# Altium PCB PCB1.PcbDoc
Units mm, origin at the board's own origin, x right, y up, seen from the top; angles counter-clockwise.
Board outline 31 x 60 mm, 2 copper layers (Top Layer, Bottom Layer); 43 components, 34 nets, 207 pads, 489 vias.
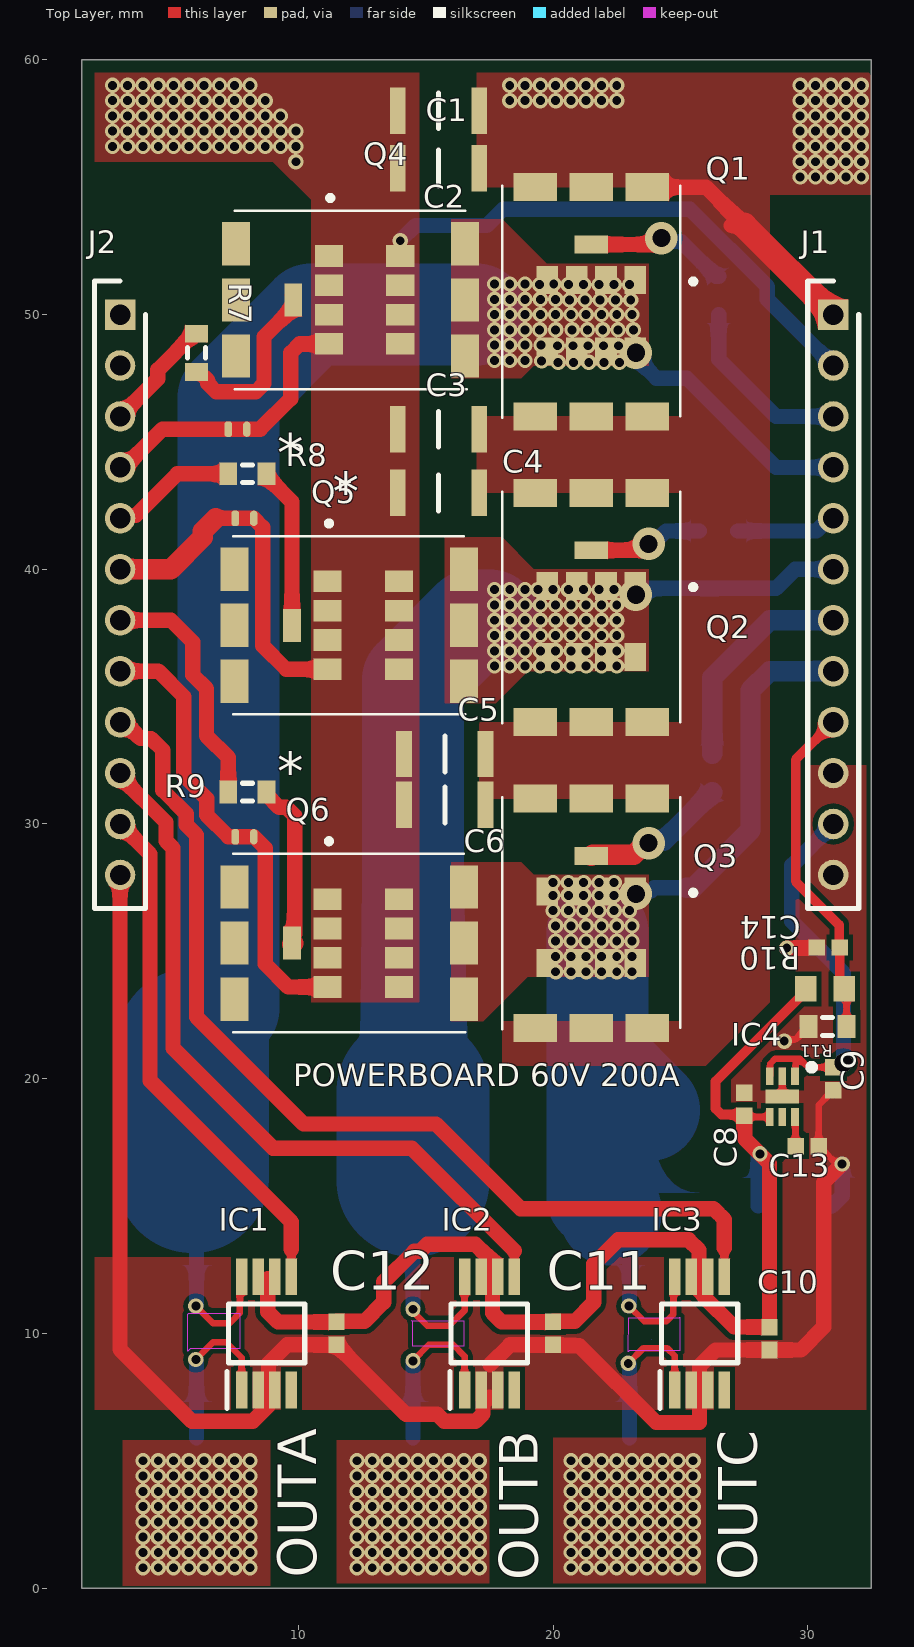
[diagram p0: Top Layer view]
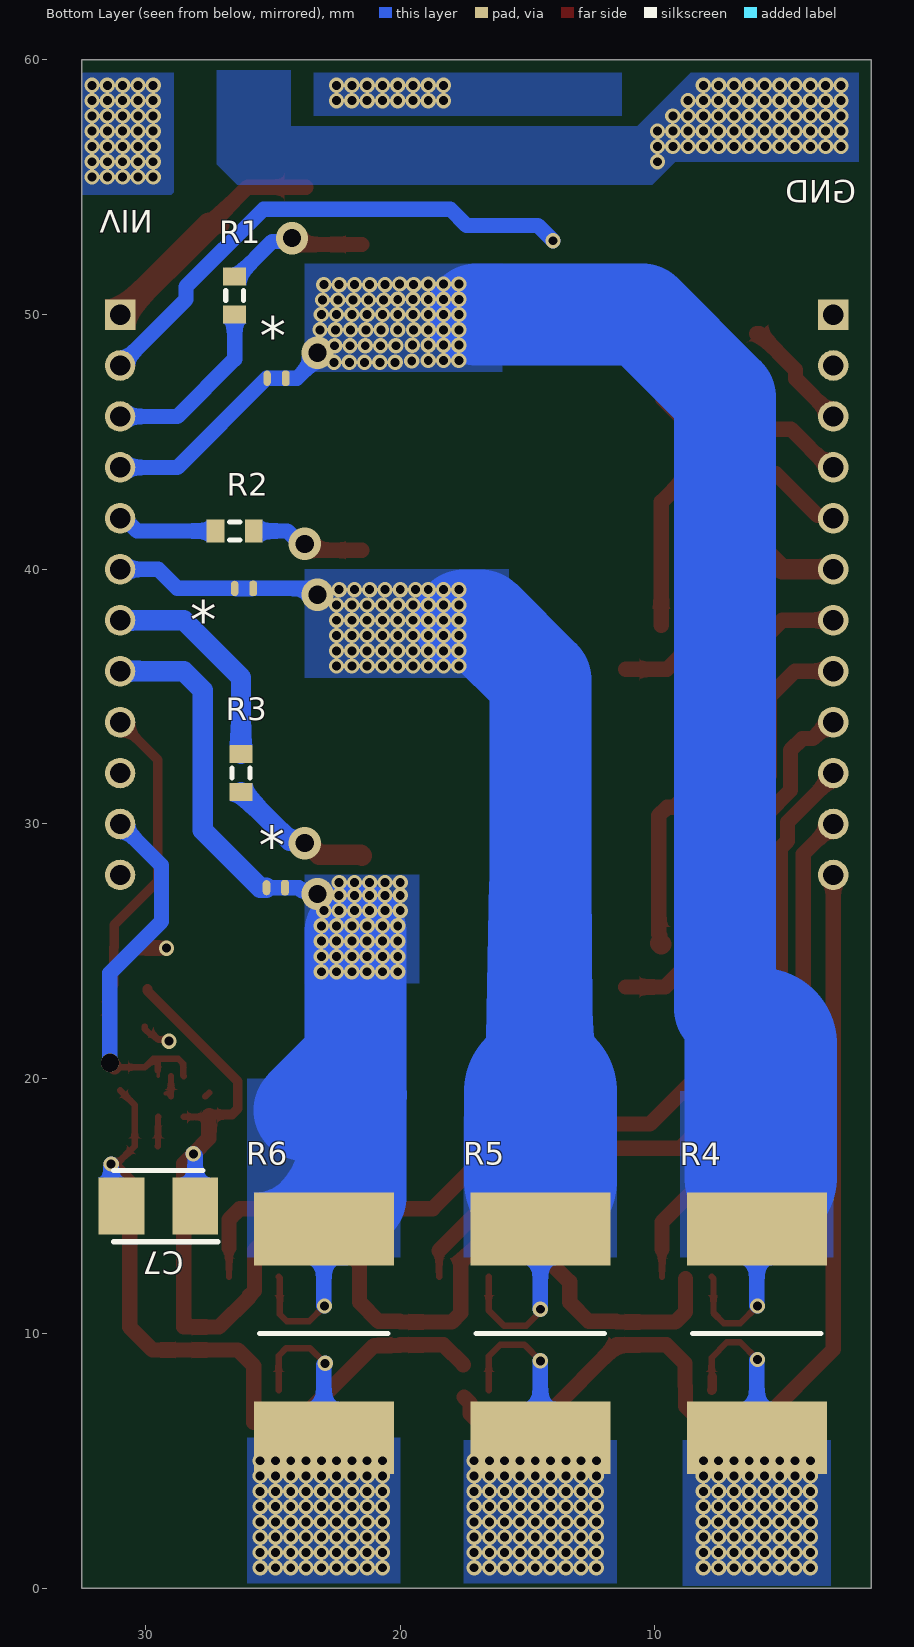
[diagram p1: Bottom Layer view, seen from below]
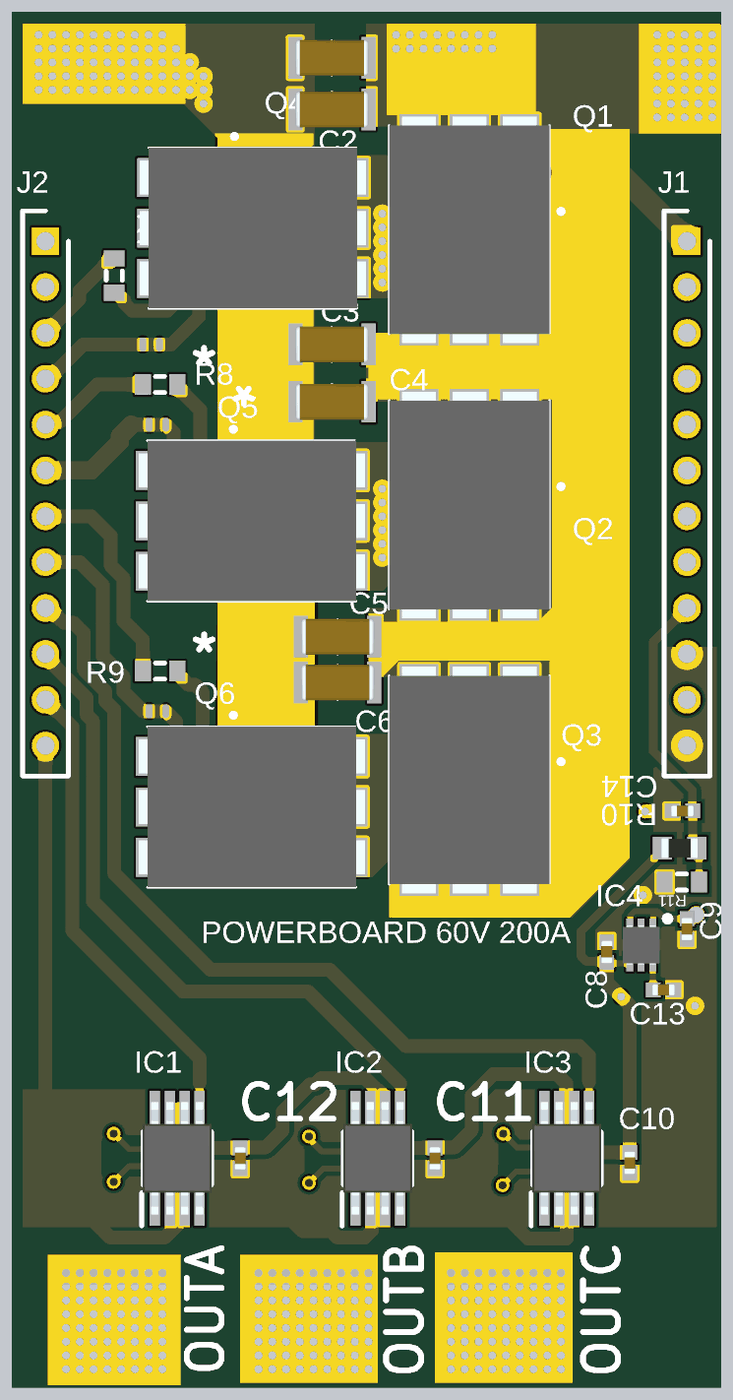
[diagram p2: 3D render of the assembled board from above, using the file's embedded part models]

## Layer stack, top to bottom
Top Solder: solder mask 0.0102, Solder Resist, Dk 3.5
Top Layer: signal copper 0.0711
Dielectric 1: dielectric 0.32, FR-4, Dk 4.8
Bottom Layer: signal copper 0.0711
Bottom Solder: solder mask 0.0102, Solder Resist, Dk 3.5

## Board outline
1.5,0 1.5,60 32.5,60 32.5,0

## Design rules (kind name [scope] priority, off if disabled: settings)
Clearance [All] p1: gap=0.2 ignorepadtopadclearanceinfootprint=TRUE
DiffPairsRouting [All] p1: maxlimit=0.254 minlimit=0.254 mostfreqgap=0.254 toplayer_minwidth=0.381 toplayer_maxwidth=4 toplayer_prefwidth=0.381 bottomlayer_minwidth=0.381 bottomlayer_maxwidth=4 bottomlayer_prefwidth=0.381 maxuncoupledlength=12.7
PlaneConnect [All] p1: planeconnectstyle=Direct reliefexpansion=0.508 reliefentries=4 reliefconductorwidth=0.254 reliefairgap=0.254
PolygonConnect [All] p1: connectstyle=Direct reliefconductorwidth=0.254 reliefentries=4 polygonreliefangle="90 Angle" airgapwidth=0.254
RoutingVias [All] p1: holewidth=0.35 width=0.6 viastyle="Through Hole" minholewidth=0.3 minwidth=0.4 maxholewidth=0.711 maxwidth=1.27
SolderMaskExpansion [All] p1: expansion=0.102
UnRoutedNet [All] p1: checkbadconnections=TRUE
Width [All] p1: maxlimit=6 minlimit=0.25 preferedwidth=0.6 checkconnectedcopper=TRUE
27 further rules are at their usual default settings.

## Classes and differential pairs
component class POWERBOARD: * C1 C2 C3 C4 C5 C6 C7 C8 C9 C10 C11 C12 C13 C14 IC1 IC2 IC3 IC4 J1 J2 Q1 Q2 Q3 Q4 Q5 Q6 R1 R2 R3 R4 R5 R6 R7 R8 R9 R10 R11

## Components (designator, comment, footprint, x,y, rotation, side; value= is the part's Value field where it differs from the comment)
* "NET_TIE" NET_TIE1 28.175,39.05 r180 bottom net-tie
* "NET_TIE" NET_TIE1 26.925,27.3 r180 bottom net-tie
* "NET_TIE" NET_TIE1 26.9,47.3 r180 bottom net-tie
* "NET_TIE" NET_TIE1 9.925,29.7 r180 top net-tie
* "NET_TIE" NET_TIE1 9.925,42.2 r180 top net-tie
* "NET_TIE" NET_TIE1 9.65,45.7 r180 top net-tie
C1 "C3216X7S2A225K160AB" CAPC3216X180N 15.5,55.75 r180 top
C2 "C3216X7S2A225K160AB" CAPC3216X180N 15.5,58 r180 top
C3 "C3216X7S2A225K160AB" CAPC3216X180N 15.5,45.5 r180 top
C4 "C3216X7S2A225K160AB" CAPC3216X180N 15.5,43 r180 top
C5 "C3216X7S2A225K160AB" CAPC3216X180N 15.75,32.75 r180 top
C6 "C3216X7S2A225K160AB" CAPC3216X180N 15.75,30.75 r180 top
C7 "100uF, 1210 tantalum cap" CAPPM3528X210N 29.5,15 r0 bottom
C8 "2.2u" CAPC1005X56N 27.5,19 r90 top
C9 "2.2u" CAPC1005X56N 31,20 r90 top
C10 "2.2u" CAPC1005X56N 28.5,9.8 r90 top
C11 "2.2u" CAPC1005X56N 20,10 r90 top
C12 "2.2u" CAPC1005X56N 11.5,10 r90 top
C13 "0.1uF, 0603" CAPC1005X56N 29.975,17.35 r180 top
C14 "2.2u" CAPC1005X56N 30.8,25.15 r180 top
IC1 "AD8418AWBRZ" SOP65P490X110-8N 8.75,10 r90 top
IC2 "AD8418AWBRZ" SOP65P490X110-8N 17.5,10 r90 top
IC3 "AD8418AWBRZ" SOP65P490X110-8N 25.75,10 r90 top
IC4 "MIC5353-3.3YMT-TR" SON50P160X160X60-7N-D 29,19.3 r270 top
J1 "M22-2011205" HDRV12W60P0X200_1X12_2415X200X525P 31,50 r270 top
J2 "M22-2011205" HDRV12W60P0X200_1X12_2415X200X525P 3,50 r270 top
Q1 "AUIRF7749L2TR" IRF7749L2TRPBF 21.5,50.5 r270 top
Q2 "AUIRF7749L2TR" IRF7749L2TRPBF 21.5,38.5 r270 top
Q3 "AUIRF7749L2TR" IRF7749L2TRPBF 21.5,26.5 r270 top
Q4 "AUIRF7749L2TR" IRF7749L2TRPBF 12.05,50.575 r0 top
Q5 "AUIRF7749L2TR" IRF7749L2TRPBF 12,37.8 r0 top
Q6 "AUIRF7749L2TR" IRF7749L2TRPBF 12,25.325 r0 top
R1 "4R7" J1-0603 26.5,50.75 r90 bottom
R2 "4R7" J1-0603 26.5,41.5 r180 bottom
R3 "4R7" J1-0603 26.25,32 r270 bottom
R4 "CSS2H-3920R-L500F" RESC10052X137N 6,10 r90 bottom
R5 "CSS2H-3920R-L500F" RESC10052X137N 14.5,10 r90 bottom
R6 "CSS2H-3920R-L500F" RESC10052X137N 23,10 r90 bottom
R7 "4R7" J1-0603 6,48.5 r270 top
R8 "4R7" J1-0603 8,43.75 r0 top
R9 "4R7" J1-0603 8,31.25 r0 top
R10 "CRCW060310K0JNTC" RESC1608X50N 30.675,23.525 r0 top
R11 "10k" J1-0603 30.775,22.05 r180 top

## Footprints (in the part's own frame and the unit in brackets; to place one, negate y for a bottom-side part, rotate by r counter-clockwise, add the part's x,y. Pads: shape width x height; smd on the part's side, far side on the other; paste and mask are expansions set on the pad)
CAPC1005X56N [mm]
  rect 0.65x0.64 smd: 1(-0.45,0) 2(0.45,0)
  body extent -0.5,-0.25 0.5,0.25, height 0.56
CAPC3216X180N [mm]
  rect 0.62x1.82 smd: 1(-1.6,0) 2(1.6,0)
  silkscreen extent 0,-0.7 0,0.7, body extent -1.6,-0.8 1.6,0.8, height 1.8
CAPPM3528X210N [mm]
  rect 1.8x2.25 smd: 1(-1.45,0) 2(1.45,0)
  silkscreen extent -2.35,-1.4 1.75,1.4, body extent -1.75,-1.4 1.75,1.4, height 2.1
HDRV12W60P0X200_1X12_2415X200X525P [mm]
  rect 1.2x1.2 hole 0.8: 1(0,0)
  round 1.2 hole 0.8: 2(2,0) 3(4,0) 4(6,0) 5(8,0) 6(10,0) 7(12,0) 8(14,0) 9(16,0) 10(18,0) 11(20,0) 12(22,0)
  silkscreen extent -1.33,-1 23.33,1
IRF7749L2TRPBF [mm]
  rect 1.1x0.85 smd: 1(-0.85,1.725) 2(-0.85,0.575) 3(-0.85,-0.575) 4(-0.85,-1.725) 5(1.95,1.725) 6(1.95,0.575) 7(1.95,-0.575) 8(1.95,-1.725)
  rect 0.7x1.3 smd: 9(-2.25,0)
  rect 1.1x1.7 smd: 10(4.5,2.2) 11(4.5,0) 12(4.5,-2.2) 13(-4.5,2.2) 14(-4.5,0) 15(-4.5,-2.2)
  silkscreen extent -4.55,-3.5 4.55,4.1, body extent -4.94,-3.5 4.94,3.5, height 1.1
J1-0603 [mm] "Chip Resistor, Body 1.6x0.8mm, IPC High Density"
  rect 0.7x0.9 smd: 1(-0.75,0) 2(0.75,0)
  silkscreen extent -0.2,-0.35 0.2,0.35, body extent -0.85,-0.48 0.85,0.48, height 0.9
NET_TIE1 [mm]
  oval 0.3x0.6 smd: 1(1.675,0.2)
  rrect70% 0.3x0.6 smd: 2(2.4,0.2)
  Top Layer region: 1.675,0.5 2.4,0.5 2.4,-0.1 1.675,-0.1
RESC1608X50N [mm]
  rect 0.85x1 smd: 1(-0.75,0) 2(0.75,0)
  body extent -0.79,-0.43 0.79,0.43, height 0.5
RESC10052X137N [mm]
  rect 2.85x5.5 smd: 1(-4.1,0) 2(4.1,0)
  silkscreen extent 0,-2.52 0,2.52, body extent -5,-2.63 5,2.63, height 1.37
SON50P160X160X60-7N-D [mm]
  rect 0.7x0.3 smd: 1(-0.8,0.5) 2(-0.8,0) 3(-0.8,-0.5) 4(0.8,-0.5) 5(0.8,0) 6(0.8,0.5)
  rect 0.55x1.31 smd: 7(0,0)
  silkscreen extent -1.27,1.03 -1.03,1.28, body extent -0.85,-0.8 0.85,0.8, height 0.6
SOP65P490X110-8N [mm]
  rect 1.45x0.45 smd: 1(-2.225,0.975) 2(-2.225,0.325) 3(-2.225,-0.325) 4(-2.225,-0.975) 5(2.225,-0.975) 6(2.225,-0.325) 7(2.225,0.325) 8(2.225,0.975)
  silkscreen extent -2.95,-1.5 1.15,1.55, body extent -2.45,-1.5 2.45,1.5, height 1.1

## Part data
C1 C2 C3 C4 C5 C6: "Capacitor", Manufacturer_Name=TDK, Mouser Part Number=810-C3216X7S2A225K, RS Part Number=7883079, Datasheet Link=https://product.tdk.com/info/en/catalog/datasheets/mlcc_commercial_midvoltage_en.pdf, Height=1.8mm, Manufacturer_Part_Number=C3216X7S2A225K160AB, Mouser Price/Stock=https://www.mouser.com/Search/Refine.aspx?Keyword=810-C3216X7S2A225K, RS Price/Stock=https://uk.rs-online.com/web/p/products/7883079
C7: library part 293D107X06R3B2TE3, "Capacitor Polarised", Manufacturer_Name=Vishay, Mouser Part Number=N/A, Datasheet Link=http://www.vishay.com/docs/40002/293d.pdf, Height=2.1mm, Manufacturer_Part_Number=293D107X06R3B2TE3, Mouser Price/Stock=https://www.mouser.com/Search/Refine.aspx?Keyword=N%2FA
C8 C9 C10 C11 C12 C13 C14: library part "Ceramic cap 0603", "Capacitor", Manufacturer_Name=AVX, Manufacturer_Part_Number=04024D225KAT2A, Mouser Part Number=581-04024D225KAT2A, Datasheet Link=http://www.mouser.com/catalog/supplier/library/pdf/AVXSurfaceMountCeramic.pdf, Height=0.56mm, Mouser Price/Stock=https://www.mouser.com/Search/Refine.aspx?Keyword=581-04024D225KAT2A
IC1 IC2 IC3: "Integrated Circuit", Manufacturer_Name="Analog Devices", Mouser Part Number=584-AD8418AWBRZ, RS Part Number=7989903, Datasheet Link=http://www.analog.com/media/en/technical-documentation/data-sheets/AD8418A.pdf, Height=1.1mm, Manufacturer_Part_Number=AD8418AWBRZ, Mouser Price/Stock=https://www.mouser.com/Search/Refine.aspx?Keyword=584-AD8418AWBRZ, RS Price/Stock=https://uk.rs-online.com/web/p/products/7989903
IC4: "Integrated Circuit", Manufacturer_Name=Microchip, Mouser Part Number=998-MIC5353-3.3YMTTR, RS Part Number=1773219P, Datasheet Link=http://ww1.microchip.com/downloads/en/DeviceDoc/mic5353.pdf, Height=0.6mm, Manufacturer_Part_Number=MIC5353-3.3YMT-TR, RS Price/Stock=http://uk.rs-online.com/web/p/products/1773219P
J1 J2: "Connector", Manufacturer_Name=HARWIN, Mouser Part Number=855-M22-2011205, RS Part Number=1730943, Datasheet Link=https://cdn.harwin.com/pdfs/M22-201.pdf, Height=5.25mm, Manufacturer_Part_Number=M22-2011205, Mouser Price/Stock=https://www.mouser.com/Search/Refine.aspx?Keyword=855-M22-2011205, RS Price/Stock=https://uk.rs-online.com/web/p/products/1730943, System=Connector
Q1 Q2 Q3 Q4 Q5 Q6: "MOSFET (N-Channel)", Manufacturer_Name=Infineon, Mouser Part Number=942-AUIRF7749L2TR, Datasheet Link=https://www.mouser.com/datasheet/2/196/auirf7749l2-1225782.pdf, Height=1mm, Manufacturer_Part_Number=AUIRF7749L2TR, Mouser Price/Stock=https://www.mouser.com/Search/Refine.aspx?Keyword=942-AUIRF7749L2TR
R1 R2 R3 R7 R8 R9 R11: library part Res3, "Resistor", LatestRevisionDate=29-May-2009, LatestRevisionNote="IPC-7351 Footprint Added.", PackageDescription="Chip Resistor", PackageReference=J1-0603, Published=8-Jun-2000, Publisher="Altium Limited"
R4 R5 R6: "Resistor", Manufacturer_Name=Bourns, Mouser Part Number=652-CSS2H3920RL500F, Allied_Number=70883778, Allied Price/Stock=https://www.alliedelec.com/bourns-css2h-3920r-l500f/70883778/, Datasheet Link=https://componentsearchengine.com/Datasheets/2/CSS2H-3920R-L500F.pdf, Height=1.37mm, Manufacturer_Part_Number=CSS2H-3920R-L500F, Mouser Price/Stock=https://www.mouser.com/Search/Refine.aspx?Keyword=652-CSS2H3920RL500F
R10: "Resistor", Manufacturer_Name=Vishay, Datasheet Link=http://www.vishay.com/docs/20035/dcrcwe3.pdf, Height=0.5mm, Manufacturer_Part_Number=CRCW060310K0JNTC

## Via types
v1: diameter 0.6, hole 0.35, Top Layer to Bottom Layer, 482 vias
v2: diameter 1.27, hole 0.711, Top Layer to Bottom Layer, 6 vias
v3: diameter 0.711, hole 0.711, Top Layer to Bottom Layer, 1 vias

## Nets (pads, with @x,y where several pads share a name; then routed paths per layer and width w, separated by ;. In a path a pad name is that pad's centre, name@x,y a point inside that pad or via, vN(x,y) a via of type N, cw(c..) or ccw(c..) an arc to the next point about the centre after c; other vN are vias at no path point)
+5: C9.2 IC4.1 IC4.3 J1.11 | length 15.1
  Top Layer w0.15: IC4.1 29.5,20.3 IC4.1@29.525,20.325
  Top Layer w0.25: IC4.3 28.525,20.125 28.525,20.59 28.714,20.779 29.695,20.779 ; IC4.1@29.525,20.325 29.525,20.609 29.695,20.779 ; C9.2 30.024,20.45 29.695,20.779
  Top Layer w0.6: C9.2@31.22,20.475 31.37,20.625 v3(31.4,20.625)
  Bottom Layer w0.6: J1.11 29.375,28.375 29.375,26.175 31.4,24.15 v3(31.4,20.625)
ADC_TEMP: C14.1 J1.9 R10.2 R11.1 | length 13.4
  Top Layer w0.25: R10.2 31.525,23.425 R11.1
  Top Layer w0.381: J1.9 29.525,32.525 29.525,27.75 31.233,26.042 31.233,25.167 C14.1 31.25,23.7 R10.2
C_A: IC1.5 J2.11 | length 20.6
  Top Layer w0.25: IC1.5 9.725,13.3
  Top Layer w0.6: J2.11 4.178,28.822 4.178,19.922 9.725,14.375 9.725,13.3
C_B: IC2.5 J2.10 | length 29.4
  Top Layer w0.25: IC2.5 18.475,13.25
  Top Layer w0.6: J2.10 3,31.869 4.8,30.069 4.8,29.331 5.075,29.056 5.075,21.2 9,17.275 14.45,17.275 18.475,13.25
C_C: IC3.5 J2.9 | length 39.4
  Top Layer w0.25: 26.512,14.688 26.619,14.581 ; IC3.5 26.725,13.35
  Top Layer w0.6: J2.9 3.162,34 3.803,33.359 4.216,33.359 4.675,32.9 4.675,31.325 5.6,30.4 5.6,29.969 6,29.569 6,22.425 10.2,18.225 15.4,18.225 18.725,14.9 26.3,14.9 26.512,14.688 ; 26.619,14.581 26.725,14.475 26.725,13.35
CURR_A_N: IC1.1 R4.1 | length 7.3
  Top Layer w0.25: v1(5.975,8.975) 6.65,9.65 7.175,9.65 7.775,9.05 IC1.1
  Top Layer w0.381: IC1.1@7.755,8.295 7.755,7.795 IC1.1
  Bottom Layer w0.381: R4.1 R4.1@6.05,5.95
  Bottom Layer w0.6: v1(5.975,8.975) 6,8.95 R4.1
  other v1: 3.9,0.8 4.5,0.8 5.1,0.8 5.7,0.8 6.3,0.8 6.9,0.8 7.5,0.8 8.1,0.8 3.9,1.4 4.5,1.4 5.1,1.4 5.7,1.4 6.3,1.4 6.9,1.4 7.5,1.4 8.1,1.4 3.9,2 4.5,2 5.1,2 5.7,2 6.3,2 6.9,2 7.5,2 8.1,2 3.9,2.6 4.5,2.6 5.1,2.6 5.7,2.6 6.3,2.6 6.9,2.6 7.5,2.6 8.1,2.6 3.9,3.2 4.5,3.2 5.1,3.2 5.7,3.2 6.3,3.2 6.9,3.2 7.5,3.2 8.1,3.2 3.9,3.8 4.5,3.8 5.1,3.8 5.7,3.8 6.3,3.8 6.9,3.8 7.5,3.8 8.1,3.8 3.9,4.4 4.5,4.4 5.1,4.4 5.7,4.4 6.3,4.4 6.9,4.4 7.5,4.4 8.1,4.4 3.9,5 4.5,5 5.1,5 5.7,5 6.3,5 6.9,5 7.5,5 8.1,5
CURR_A_P: *.2@24.5,47.5 IC1.8 Q1.1 Q1.2 Q1.3 Q1.4 Q1.5 Q1.6 Q1.7 Q1.8 Q4.10 Q4.11 Q4.12 R4.2 | length 50.8
  Top Layer w0.25: v1(5.975,11.075) 6.65,10.4 7.3,10.4 7.7,10.8 7.7,12.15 IC1.8
  Top Layer w0.381: Q1.5 23.225,48.525 v2(23.25,48.5)
  Bottom Layer w0.381: v2@23.25,48.305 v2(23.25,48.5)
  Bottom Layer w0.6: v1(5.975,11.075) 6,11.1 R4.2 ; v2@23.25,48.305 24.055,47.5 *.2@24.5,47.5
  Bottom Layer w4: 5.85,21.35 7.25,22.75 7.25,46.75 10.5,50 17,50
  Bottom Layer w6: 5.85,16.15 5.85,21.35
  other v1: 20.2,48.125 20.8,48.125 21.4,48.125 22,48.125 22.6,48.125 19.55,48.175 17.7,48.2 18.3,48.2 18.9,48.2 20.175,48.775 20.775,48.775 21.375,48.775 21.975,48.775 22.575,48.775 17.7,48.8 18.3,48.8 18.9,48.8 19.525,48.8 17.7,49.4 18.3,49.4 18.9,49.4 19.475,49.4 20.1,49.4 20.75,49.4 21.35,49.4 21.95,49.4 22.55,49.4 23.15,49.4 17.7,50 18.3,50 18.9,50 19.5,50 20.1,50 20.7,50 21.3,50 21.9,50 22.5,50 23.1,50 20.65,50.575 21.25,50.575 21.85,50.575 22.45,50.575 23.05,50.575 17.7,50.6 18.3,50.6 18.9,50.6 19.5,50.6 20.1,50.6 19.475,51.175 20.6,51.175 21.2,51.175 21.8,51.175 22.4,51.175 23,51.175 17.7,51.2 18.3,51.2 18.9,51.2 20.025,51.2
CURR_B_N: IC2.1 R5.1 | length 6.8
  Top Layer w0.25: v1(14.5,8.925) 15.125,9.55 16.075,9.55 16.525,9.1 IC2.1
  Bottom Layer w0.6: R5.1 v1(14.5,8.925)
  other v1: 12.3,0.8 12.9,0.8 13.5,0.8 14.1,0.8 14.7,0.8 15.3,0.8 15.9,0.8 16.5,0.8 17.1,0.8 12.3,1.4 12.9,1.4 13.5,1.4 14.1,1.4 14.7,1.4 15.3,1.4 15.9,1.4 16.5,1.4 17.1,1.4 12.3,2 12.9,2 13.5,2 14.1,2 14.7,2 15.3,2 15.9,2 16.5,2 17.1,2 12.3,2.6 12.9,2.6 13.5,2.6 14.1,2.6 14.7,2.6 15.3,2.6 15.9,2.6 16.5,2.6 17.1,2.6 12.3,3.2 12.9,3.2 13.5,3.2 14.1,3.2 14.7,3.2 15.3,3.2 15.9,3.2 16.5,3.2 17.1,3.2 12.3,3.8 12.9,3.8 13.5,3.8 14.1,3.8 14.7,3.8 15.3,3.8 15.9,3.8 16.5,3.8 17.1,3.8 12.3,4.4 12.9,4.4 13.5,4.4 14.1,4.4 14.7,4.4 15.3,4.4 15.9,4.4 16.5,4.4 17.1,4.4 12.3,5 12.9,5 13.5,5 14.1,5 14.7,5 15.3,5 15.9,5 16.5,5 17.1,5
CURR_B_P: *.2@25.775,39.25 IC2.8 Q2.1 Q2.2 Q2.3 Q2.4 Q2.5 Q2.6 Q2.7 Q2.8 Q5.10 Q5.11 Q5.12 R5.2 | length 35.2
  Top Layer w0.25: v1(14.5,10.95) 14.5,10.855 15.055,10.3 15.925,10.3 16.525,10.9 IC2.8
  Bottom Layer w0.25: R5.2 14.5,16
  Bottom Layer w0.381: v2(23.25,39) 23.491,39 v2@23.741,39.25
  Bottom Layer w0.6: v1(14.5,10.95) R5.2 ; v2@23.741,39.25 *.2@25.775,39.25
  Bottom Layer w4: 14.5,19.5 14.5,35.657 16.843,38 v1@17.5,38
  Bottom Layer w6: 14.5,16 14.5,19.5
  other v1: 17.7,36.2 18.3,36.2 18.9,36.2 19.5,36.2 20.1,36.2 20.7,36.2 21.3,36.2 21.9,36.2 22.5,36.2 17.7,36.8 18.3,36.8 18.9,36.8 19.5,36.8 20.1,36.8 20.7,36.8 21.3,36.8 21.9,36.8 22.5,36.8 17.7,37.4 18.3,37.4 18.9,37.4 19.5,37.4 20.1,37.4 20.7,37.4 21.3,37.4 21.9,37.4 22.5,37.4 17.7,38 18.3,38 18.9,38 19.5,38 20.1,38 20.7,38 21.3,38 21.9,38 22.5,38 17.7,38.6 18.3,38.6 18.9,38.6 19.5,38.6 20.1,38.6 20.7,38.6 21.3,38.6 21.9,38.6 22.5,38.6 17.7,39.2 18.3,39.2 18.9,39.2 19.4,39.2 20,39.2 20.6,39.2 21.2,39.2 21.8,39.2 22.4,39.2
CURR_C_N: IC3.1 R6.1 | length 6.5
  Top Layer w0.25: v1(22.95,8.825) 23.55,9.425 24.475,9.425 24.775,9.125 IC3.1
  Bottom Layer w0.6: v1(22.95,8.825) 23,8.775 R6.1
  other v1: 20.7,0.8 21.3,0.8 21.9,0.8 22.5,0.8 23.1,0.8 23.7,0.8 24.3,0.8 24.9,0.8 25.5,0.8 20.7,1.4 21.3,1.4 21.9,1.4 22.5,1.4 23.1,1.4 23.7,1.4 24.3,1.4 24.9,1.4 25.5,1.4 20.7,2 21.3,2 21.9,2 22.5,2 23.1,2 23.7,2 24.3,2 24.9,2 25.5,2 20.7,2.6 21.3,2.6 21.9,2.6 22.5,2.6 23.1,2.6 23.7,2.6 24.3,2.6 24.9,2.6 25.5,2.6 20.7,3.2 21.3,3.2 21.9,3.2 22.5,3.2 23.1,3.2 23.7,3.2 24.3,3.2 24.9,3.2 25.5,3.2 20.7,3.8 21.3,3.8 21.9,3.8 22.5,3.8 23.1,3.8 23.7,3.8 24.3,3.8 24.9,3.8 25.5,3.8 20.7,4.4 21.3,4.4 21.9,4.4 22.5,4.4 23.1,4.4 23.7,4.4 24.3,4.4 24.9,4.4 25.5,4.4 20.7,5 21.3,5 21.9,5 22.5,5 23.1,5 23.7,5 24.3,5 24.9,5 25.5,5
CURR_C_P: *.2@24.525,27.5 IC3.8 Q3.1 Q3.2 Q3.3 Q3.4 Q3.5 Q3.6 Q3.7 Q3.8 Q6.10 Q6.11 Q6.12 R6.2 | length 22.3
  Top Layer w0.25: v1(22.975,11.075) 23.575,10.475 24.45,10.475 24.725,10.75 24.725,12.175 IC3.8
  Top Layer w0.381: Q3.1 23.25,27.325 v2(23.25,27.25)
  Bottom Layer w0.6: v1(22.975,11.075) 23,11.1 R6.2 ; v2(23.25,27.25) 23.378,27.378 23.849,27.378 23.971,27.5 *.2@24.525,27.5
  Bottom Layer w4: v1@21.75,25.75 21.75,20.782 ; R6.2@22.25,14.675 22.25,14.85 21.75,15.35 21.75,20.782 ; 23.77,18.762 21.75,20.782
  other v1: 20.1,24.2 20.7,24.2 21.3,24.2 21.9,24.2 22.5,24.2 23.1,24.2 20.1,24.8 20.7,24.8 21.3,24.8 21.9,24.8 22.5,24.8 23.1,24.8 20.1,25.4 20.7,25.4 21.3,25.4 21.9,25.4 22.5,25.4 23.1,25.4 20.1,26 20.7,26 21.3,26 21.9,26 22.5,26 23.1,26 20,26.6 20.6,26.6 21.2,26.6 21.8,26.6 22.4,26.6 23,26.6 20,27.2 20.6,27.2 21.2,27.2 21.8,27.2 22.4,27.2 20,27.7 20.6,27.7 21.2,27.7 21.8,27.7 22.4,27.7
GH_A: J1.3 R1.1 | length 7.2
  Bottom Layer w0.6: R1.1 26.5,48.25 28.75,46 J1.3
GH_B: J1.5 R2.1 | length 4
  Bottom Layer w0.6: R2.1 30.338,41.5 30.838,42 J1.5
GH_C: J1.7 R3.1 | length 8.7
  Bottom Layer w0.8: R3.1 26.25,35.75 28.5,38 J1.7
GL_A: J2.3 R7.1 | length 4.6
  Top Layer w0.6: J2.3 4.482,47.482 4.482,47.832 5.9,49.25 R7.1
GL_B: J2.5 R8.1 | length 5
  Top Layer w0.6: J2.5 3.115,42.115 3.615,42.115 5.25,43.75 7,43.75 R8.1
GL_C: J2.7 R9.1 | length 9.7
  Top Layer w0.6: J2.7 5,38 5.854,37.146 5.854,35.854 6.396,35.312 6.396,33.462 7.25,32.608 R9.1
GND: C7.2 C8.2 C9.1 C10.1 C11.1 C12.1 C13.1 C14.2 IC1.2 IC1.3 IC2.2 IC2.3 IC3.2 IC3.3 IC4.2 IC4.7 J1.10 J1.12 J2.12 R11.2 | length 71.8
  Top Layer w0.15: IC4.7 29.167,19.467 IC4.7@29.214,19.421
  Top Layer w0.25: C8.2 C8.2@27.65,19.3 ; IC4.7 IC4.2 ; v1(29.075,21.475) 29.142,21.542 29.517,21.542 29.7,21.725 29.8,21.725 30.025,21.95 R11.2 ; C9.1 31,19.545 30.425,18.97 C13.1 30.43,17.35 31.063,16.717 31.283,16.717 v1(31.35,16.65)
  Top Layer w0.6: J2.12 3,9.375 5.825,6.55 8.207,6.55 8.8,7.143 8.8,7.925 8.825,7.95 8.825,8.825 9.55,9.55 C12.1 11.5,9.545 11.52,9.525 11.525,9.525 14.225,6.825 15.454,6.825 15.729,6.55 16.957,6.55 17.25,6.843 17.25,7.25 17.5,7.5 ; 17.525,8.775 18.3,9.55 C11.1 20,9.545 20.02,9.525 21.025,9.525 24.05,6.5 25.75,6.5 25.75,8.725 26.375,9.35 C10.1 29.725,9.35 30.625,10.25 30.625,15.925 v1(31.35,16.65) ; v1(29.175,25.125) 29.18,25.13 30.33,25.13 C14.2
  Bottom Layer w0.6: C7.2 31.35,15.4 v1(31.35,16.65)
NetC13_2: C13.2 IC4.6 | length 1.2
  Top Layer w0.25: IC4.6 29.512,18.487 29.512,17.363 C13.2
NetQ1_9: Q1.9 R1.2 | length 5.7
  Top Layer w0.6: Q1.9 23.819,52.75 24.069,53 v2(24.25,53)
  Bottom Layer w0.6: v2(24.25,53) 24.378,52.872 25.028,52.872 26.4,51.5 R1.2
NetQ2_9: Q2.9 R2.2 | length 4.6
  Top Layer w0.6: Q2.9 23.5,40.75 v2(23.75,41)
  Bottom Layer w0.6: v2(23.75,41) 23.931,41 24.431,41.5 R2.2
NetQ3_9: Q3.9 R3.2 | length 5.8
  Top Layer w0.8: Q3.9 21.55,28.8 23.173,28.8 23.623,29.25 v2(23.75,29.25)
  Bottom Layer w0.8: v2(23.75,29.25) 23.84,29.34 24.34,29.34 R3.2
NetQ4_9: Q4.9 R7.2 | length 6.9
  Top Layer w0.6: R7.2 6.1,47.75 6.446,47.404 6.446,47.296 6.771,46.971 8.329,46.971 8.654,47.296 8.654,49.129 9.8,50.275 Q4.9
NetQ5_9: Q5.9 R8.2 | length 6.4
  Top Layer w0.6: R8.2 8.75,43.65 9.75,42.65 Q5.9
NetQ6_9: Q6.9 R9.2 | length 6.6
  Top Layer w0.6: R9.2 8.75,31.15 9.246,30.654 9.529,30.654 9.854,30.329 9.854,25.679 9.8,25.625 Q6.9@9.8,25.325
  Top Layer w0.8: Q6.9@9.75,25.275 Q6.9@9.8,25.325
PWRGND: *.1@7.975,45.5 *.1@8.25,29.5 *.1@8.25,42 C1.2 C2.2 C3.2 C4.2 C5.2 C6.2 J1.2 Q4.1 Q4.2 Q4.3 Q4.4 Q4.5 Q4.6 Q4.7 Q4.8 Q5.1 Q5.2 Q5.3 Q5.4 Q5.5 Q5.6 Q5.7 Q5.8 Q6.1 Q6.2 Q6.3 Q6.4 Q6.5 Q6.6 Q6.7 Q6.8 | length 42.1
  Top Layer w0.6: *.1@7.975,45.5 8.5,45.5 9.7,46.7 9.7,48.499 10.051,48.85 Q4.4 ; *.1@8.25,29.5 8.7,29.05 8.7,24.5 9.6,23.6 Q6.4 ; *.1@8.25,42 8.6,41.65 8.6,37 9.525,36.075 Q5.4
  Bottom Layer w0.6: v1(14,52.9) 14.6,53.5 17.4,53.5 18.035,54.135 25.372,54.135 28.411,51.096 28.411,50.589 J1.2
  other v1: 9.9,56 2.7,56.6 3.3,56.6 3.9,56.6 4.5,56.6 5.1,56.6 5.7,56.6 6.3,56.6 6.9,56.6 7.5,56.6 8.1,56.6 8.7,56.6 9.3,56.6 9.9,56.6 2.7,57.2 3.3,57.2 3.9,57.2 4.5,57.2 5.1,57.2 5.7,57.2 6.3,57.2 6.9,57.2 7.5,57.2 8.1,57.2 8.7,57.2 9.3,57.2 9.9,57.2 2.7,57.8 3.3,57.8 3.9,57.8 4.5,57.8 5.1,57.8 5.7,57.8 6.3,57.8 6.9,57.8 7.5,57.8 8.1,57.8 8.7,57.8 9.3,57.8 2.7,58.4 3.3,58.4 3.9,58.4 4.5,58.4 5.1,58.4 5.7,58.4 6.3,58.4 6.9,58.4 7.5,58.4 8.1,58.4 8.7,58.4 2.7,59 3.3,59 3.9,59 4.5,59 5.1,59 5.7,59 6.3,59 6.9,59 7.5,59 8.1,59
SH_A: *.1@25.225,47.5 J1.4 | length 7.2
  Bottom Layer w0.6: *.1@25.225,47.5 25.25,47.5 28.75,44 J1.4
SH_B: *.1@26.5,39.25 J1.6 | length 4.8
  Bottom Layer w0.6: *.1@26.5,39.25 28.75,39.25 29.5,40 J1.6
SH_C: *.1@25.25,27.5 J1.8 | length 12.5
  Bottom Layer w0.8: *.1@25.25,27.5 25.5,27.5 27.75,29.75 27.75,35.25 28.5,36 J1.8
SL_A: *.2@7.25,45.5 J2.4 | length 4.9
  Top Layer w0.6: J2.4 3.162,44 4.662,45.5 *.2@7.25,45.5
  Top Layer w1: J2.4 J2.4@3.038,44.038
SL_B: *.2@7.525,42 J2.6 | length 5.5
  Top Layer w0.6: 6.75,42 *.2@7.525,42
  Top Layer w0.8: J2.6 5,40 6.25,41.25 6.25,41.5 6.75,42
SL_C: *.2@7.525,29.5 J2.8 | length 9.4
  Top Layer w0.6: J2.8 4.5,36 5.5,35 5.5,31.9 6.4,31 6.4,30.35 7.25,29.5 *.2@7.525,29.5
SUPPLY: C1.1 C2.1 C3.1 C4.1 C5.1 C6.1 J1.1 Q1.10 Q1.11 Q1.12 Q1.13 Q1.14 Q1.15 Q2.10 Q2.11 Q2.12 Q2.13 Q2.14 Q2.15 Q3.10 Q3.11 Q3.12 Q3.13 Q3.14 Q3.15 | length 9.9
  Top Layer w0.6: Q1.13 26,55 27.5,53.5 27,53.5
  Top Layer w1: 27.5,53.5 J1.1
  other v1: 29.7,55.4 30.3,55.4 30.9,55.4 31.5,55.4 32.1,55.4 29.7,56 30.3,56 30.9,56 31.5,56 32.1,56 29.7,56.6 30.3,56.6 30.9,56.6 31.5,56.6 32.1,56.6 29.7,57.2 30.3,57.2 30.9,57.2 31.5,57.2 32.1,57.2 29.7,57.8 30.3,57.8 30.9,57.8 31.5,57.8 32.1,57.8 18.3,58.4 18.9,58.4 19.5,58.4 20.1,58.4 20.7,58.4 21.3,58.4 21.9,58.4 22.5,58.4 29.7,58.4 30.3,58.4 30.9,58.4 31.5,58.4 32.1,58.4 18.3,59 18.9,59 19.5,59 20.1,59 20.7,59 21.3,59 21.9,59 22.5,59 29.7,59 30.3,59 30.9,59 31.5,59 32.1,59
VCC: C7.1 C8.1 C10.2 C11.2 C12.2 IC1.6 IC1.7 IC2.6 IC2.7 IC3.6 IC3.7 IC4.4 R10.1 | length 49.1
  Top Layer w0.15: C8.1@27.52,18.53 C8.1@27.55,18.5
  Top Layer w0.25: C8.1@27.55,18.5 IC4.4
  Top Layer w0.381: C8.1 27.459,18.591 26.608,18.591 26.375,18.825 26.375,19.9 29.925,23.45 R10.1
  Top Layer w0.6: 8.8,12.15 8.8,10.85 9.2,10.45 C12.2 11.5,10.455 11.52,10.475 12.6,10.475 13.35,11.225 13.35,12.025 14.55,13.225 14.775,13.225 15.05,13.5 16.95,13.5 17.625,12.825 17.625,10.801 17.976,10.45 C11.2 20,10.455 20.02,10.475 20.85,10.475 21.6,11.225 21.6,12.725 22.55,13.675 25.325,13.675 25.725,13.275 25.725,11.675 25.925,11.475 25.925,11.439 27.114,10.25 C10.2 28.5,16.675 v1(28.125,17.05) 27.52,17.655 27.52,18.53 C8.1
  Bottom Layer w0.6: C7.1 28.05,16.975 v1(28.125,17.05)
pads on no net: IC1.4 IC2.4 IC3.4 IC4.5 J2.1 J2.2 Q4.13 Q4.14 Q4.15 Q5.13 Q5.14 Q5.15 Q6.13 Q6.14 Q6.15

## Polygon pours and split planes (outlines as drawn)
GND on Top Layer "GND_L01_P034" (solid, remove dead copper, pour order 34): 2,13 27,13 27,21 29.525,23.525 29.525,32.3 32.3,32.3 32.3,7 2,7
SUPPLY on Top Layer "SUPPLY_L01_P062" (solid, pour order 62): 28.5,59.5 32.4,59.5 32.5,59.4 32.5,54.7 28.5,54.7
CURR_A_N on Top Layer "Top Layer-CURR_A_N" (solid, pour order 46): 3.1,5.8 8.9,5.8 8.9,0.1 3.1,0.1
CURR_C_N on Top Layer "CURR_C_N_L01_P054" (solid, pour order 54): 20,5.9 26,5.9 26,0.2 20,0.2
CURR_B_N on Top Layer "CURR_B_N_L01_P052" (solid, pour order 52): 11.5,5.8 17.5,5.8 17.5,0.2 11.5,0.2
CURR_A_P on Top Layer "CURR_A_P_L01_P024" (solid, pour order 24): 16,53.75 18,53.75 19.75,52 23.75,52 23.75,48 19.25,48 18.75,47.5 16,47.5
CURR_B_P on Top Layer "CURR_B_P_L01_P020" (solid, pour order 20): 18,41.25 19.25,40 23.75,40 23.75,36 19,36 17.75,34.75 15.75,34.75 15.75,41.25
PWRGND on Top Layer "PWRGND_L01_P004" (solid, pour order 4): 2,59.5 14.75,59.5 14.75,23 10.5,23 10.5,54.5 9,56 2,56
no net on Top Layer "Top Layer-No Net 1" (solid, pour order 18): 23.75,2.5
no net on Top Layer "Top Layer-No Net 2" (solid, pour order 14): 22,2.25
CURR_C_P on Top Layer "CURR_C_P_L01_P010" (solid, pour order 10): 16,28.5 18.75,28.5 19.25,28 23.75,28 23.75,24 19,24 17.25,22.25 16,22.25
no net on Top Layer "Top Layer-No Net" (solid, pour order 8): 16,28.25
SUPPLY on Top Layer "SUPPLY_L01_P000" (solid, pour order 0): 28.5,59.5 28.5,23 26,20.5 18,20.5 18,22.25 25,22.25 25,31 17.1,31 17.1,33.9 17.125,34 25,34 25,43 17,43 17,46 25,46 25,55 17,55 17,59.5
SUPPLY on Bottom Layer "SUPPLY_L02_P080" (solid, pour order 80): 28.9,59.5 32.5,59.5 32.5,54.7 29,54.7 28.9,54.8
PWRGND on Bottom Layer "PWRGND_L02_P078" (solid, pour order 78): 2,59.5 8.6,59.5 10.7,57.4 24.3,57.4 24.3,59.6 27.2,59.6 27.2,55.9 26.4,55.1 10.1,55.1 9.2,56 2,56
no net on Bottom Layer "Bottom Layer-No Net 1" (solid, pour order 76): 9.3,59.5
SUPPLY on Bottom Layer "SUPPLY_L02_P068" (solid, pour order 68): 11.3,59.5 23.4,59.5 23.4,57.8 11.3,57.8
no net on Bottom Layer "Bottom Layer-No Net 2" (solid, pour order 66): 17,59.5
no net on Bottom Layer "Bottom Layer-No Net 3" (solid, pour order 64): 20.2,59.5
CURR_C_N on Bottom Layer "CURR_C_N_L02_P060" (solid, pour order 60): 20,5.9 26,5.9 26,0.2 20,0.2
CURR_B_N on Bottom Layer "CURR_B_N_L02_P050" (solid, pour order 50): 11.5,5.8 17.5,5.8 17.5,0.2 11.5,0.2
CURR_A_N on Bottom Layer "CURR_A_N_L02_P048" (solid, pour order 48): 3.1,5.8 8.9,5.8 8.9,0.1 3.1,0.1
CURR_C_P on Bottom Layer "Bottom Layer-CURR_C_P 1" (solid, pour order 44): 20,13 20,20 26,20 26,13
CURR_A_P on Bottom Layer "CURR_A_P_L02_P042" (solid, pour order 42): 3,13 3,19.5 9,19.5 9,13
CURR_B_P on Bottom Layer "CURR_B_P_L02_P040" (solid, pour order 40): 11.5,13 11.5,18.5 17.5,18.5 17.5,13
CURR_C_P on Bottom Layer "Bottom Layer-CURR_C_P" (solid, pour order 32): 19.25,28 23.75,28 23.75,23.75 19.25,23.75
CURR_B_P on Bottom Layer "CURR_B_P_L02_P030" (solid, pour order 30): 15.75,40 23.75,40 23.75,35.75 15.75,35.75
CURR_A_P on Bottom Layer "CURR_A_P_L02_P026" (solid, pour order 26): 16,52 23.75,52 23.75,47.75 16,47.75
no net on Bottom Layer "Bottom Layer-No Net" (solid, pour order 22): 16,53.75

## Keep-outs
Top Layer:
  region: 23.85,9.775
  region: 22.975,10.616 24.958,10.616 24.973,10.632 24.973,9.323 22.989,9.323 22.95,9.284
  region: 14.46,10.499 14.46,10.5 16.5,10.5 16.5,9.5 14.5,9.5 14.5,10.459
  region: 5.651,10.751 5.7,10.8 7.7,10.8 7.7,9.4 5.751,9.4 5.651,9.299
  region: 7.209,10.705

## Other copper
Bottom Layer:
  region net CURR_A_N: 3.3,0.3
  region net CURR_A_N: 3.3,0.3
  region net SUPPLY: 11.9,58.6

## Silkscreen, mask and mechanical layers (free items; w line width, h text height)
Top Overlay:
  text "POWERBOARD 60V 200A" at 9.8,19.4 h1.52
  text "OUTA" at 10.7,0.4 h1.52 r90
  text "OUTB" at 19.4,0.3 h1.52 r90
  text "OUTC" at 28,0.3 h1.52 r90
Bottom Overlay:
  text "VIN" at 31.8,54.4 h1.52 r180
  text "GND" at 2.1,54.1 h1.52
Top Solder:
  region: 20,5.9 26,5.9 26,0.2 20,0.2
  region: 11.5,5.8 17.5,5.8 17.5,0.2 11.5,0.2
  region: 3.1,5.8 8.9,5.8 8.9,0.1 3.1,0.1
  region: 2,59.5 9.1,59.5 9.1,56 2,56
  region: 26.6,51.9
  region: 26.7,52.2
  region: 26.7,52.2
  region: 25,54.9 28.5,54.9 28.5,23.1 25.9,20.5 18,20.5 18,22.1 24.8,22.1 25,22.3 25,31.7 18.4,31.7 16.9,30.2 16.9,33.4 24.5,33.4 25.1,34 25.1,43.1 17.1,43.1 17.1,46 25,46
  region: 17.9,59.5 24.4,59.5 24.4,55.5 17.9,55.5
  region: 28.9,59.5 32.5,59.5 32.5,54.6 32.4,54.7 28.9,54.7
  region: 10.5,35.3 14.9,35.3 14.9,27.8 10.4,27.8
  region: 10.5,48.1 14.7,48.1 14.7,40.3 10.5,40.3
  region: 14.7,54.7 10.4,54.7 10.4,54.1 14.6,54.1 14.7,54.2
Bottom Solder:
  region: 20,5.9 26,5.9 26,0.2 20,0.2
  region: 11.5,5.8 17.5,5.8 17.5,0.2 11.5,0.2
  region: 3.1,5.8 8.9,5.8 8.9,0.1 3.1,0.1
  region: 23.75,52 23.75,48.159 23.341,47.75 11.05,47.75 9.3,46 9.3,22 8.9,21.6 9,21.5 9,13 3,13 3,15.5 2.8,15.7 2.8,22.6 5.3,25.1 5.3,47.6 9.8,52.1 10.3,52.1
  region: 23.75,40 15.75,40 15.75,39.65 12.5,36.4 12.5,21.8 11.5,20.8 11.5,13 17.5,13 17.5,20.8 16.5,21.8 16.6,21.9 16.6,35.1 17.4,35.9 17.55,35.75 23.75,35.75
  region: 19.25,28 23.75,28 23.75,21.75 23.7,21.7 25.4,20 26,20 26,12.7 25.9,12.6 20,12.6 20,14.6 19.7,14.9 19.7,20.3 19.25,20.75
  region: 24.3,59.6 27.2,59.6 27.2,55.9 24.4,55.9 24.3,55.8
  region: 11.3,59.5 14.8,59.5 14.8,57.8 11.3,57.8
  region: 2,59.5 5.3,59.5 5.3,56 2,56
Mechanical 1:
  the board outline again, w0.254